# Altium PCB power_dist.PcbDoc
Units mm, origin at the board's own origin, x right, y up, seen from the top; angles counter-clockwise.
Board outline 72.45 x 72.45 mm, 2 copper layers (Top Layer, Bottom Layer); 66 components, 36 nets, 169 pads, 28 vias.
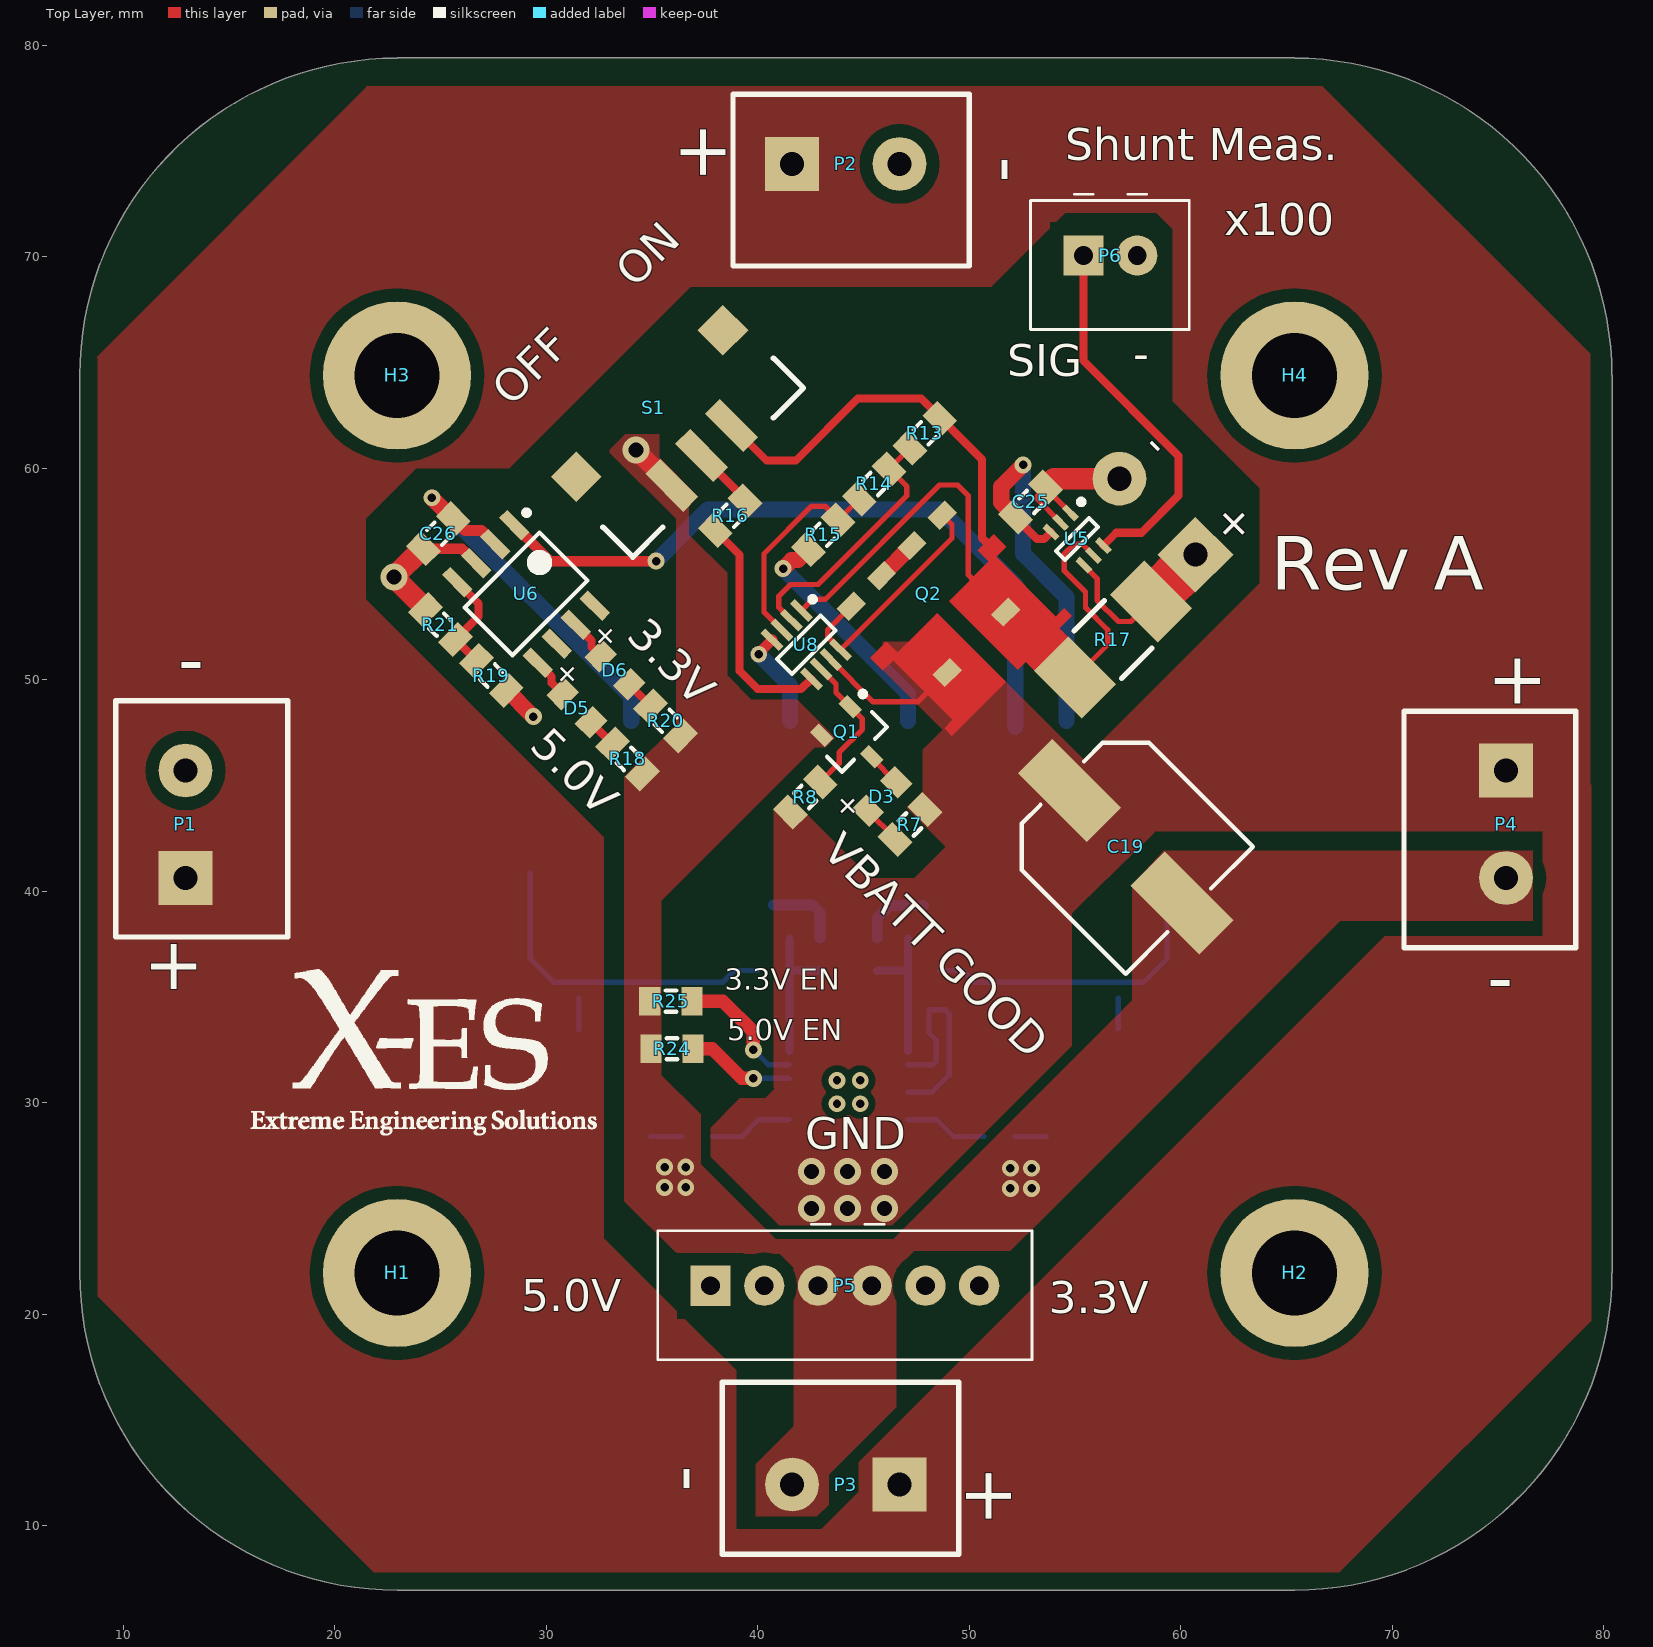
[diagram p0: Top Layer view]
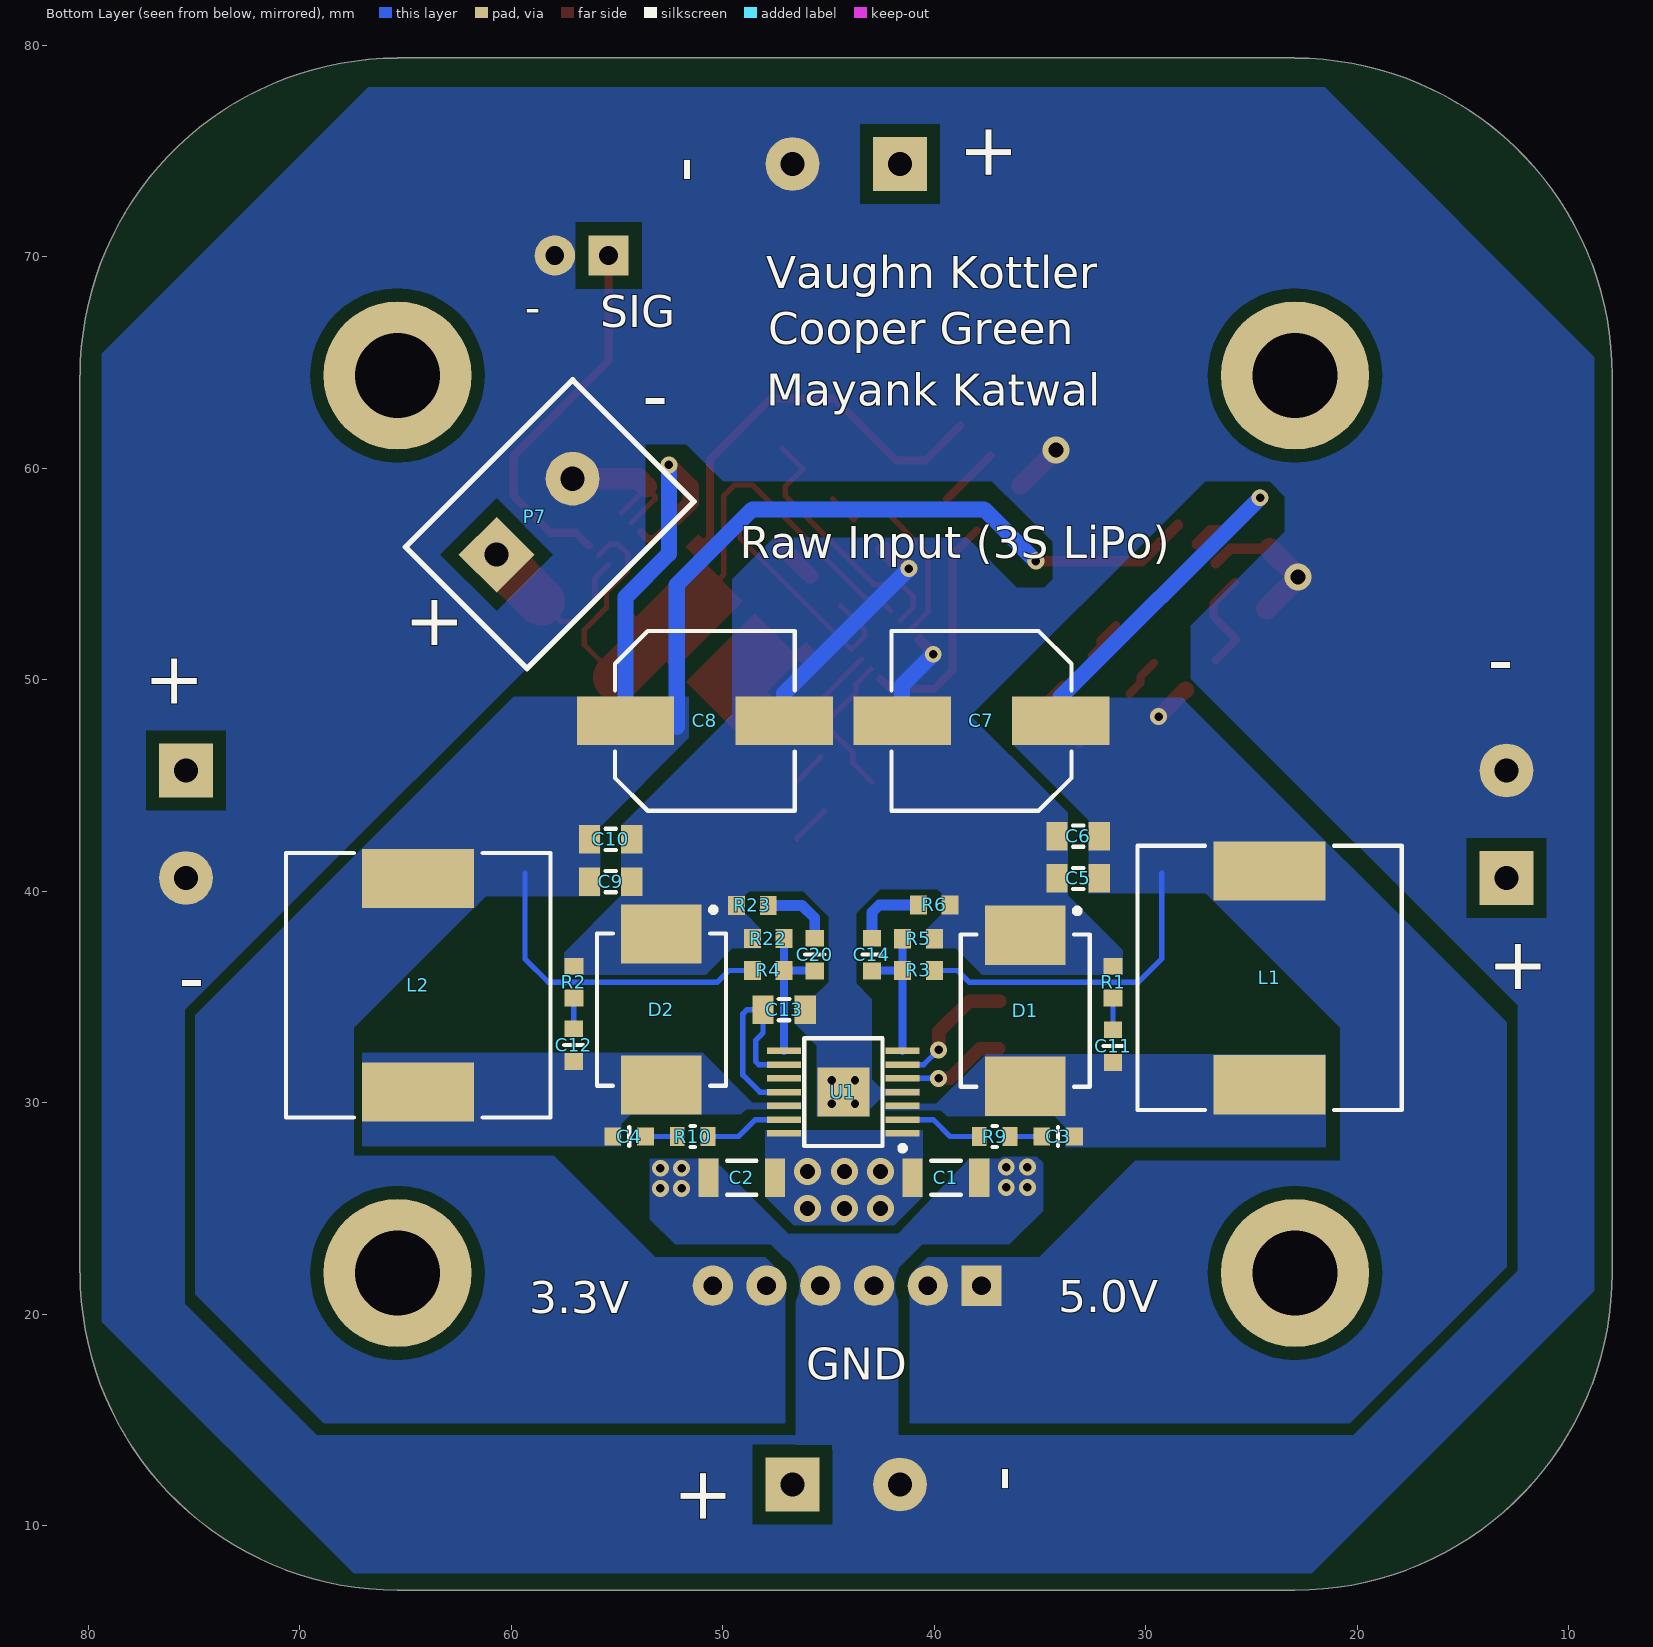
[diagram p1: Bottom Layer view, seen from below]
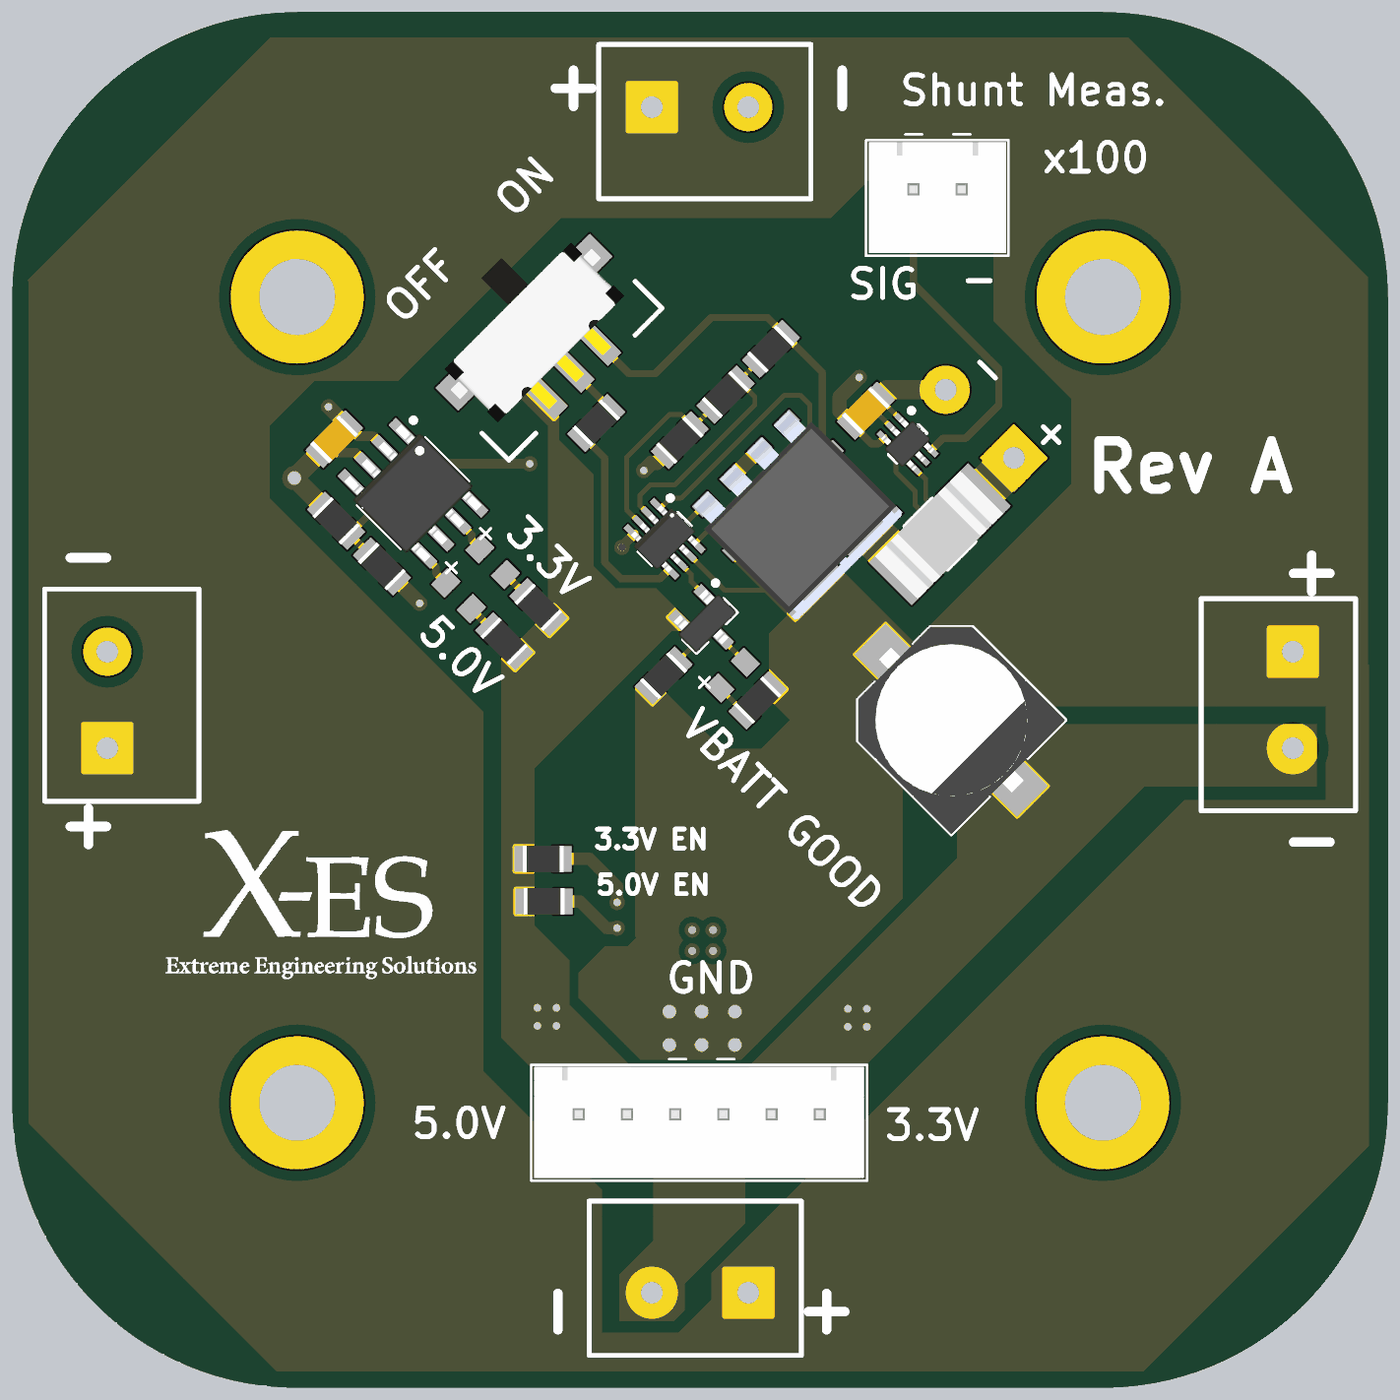
[diagram p2: 3D render of the assembled board from above, using the file's embedded part models]
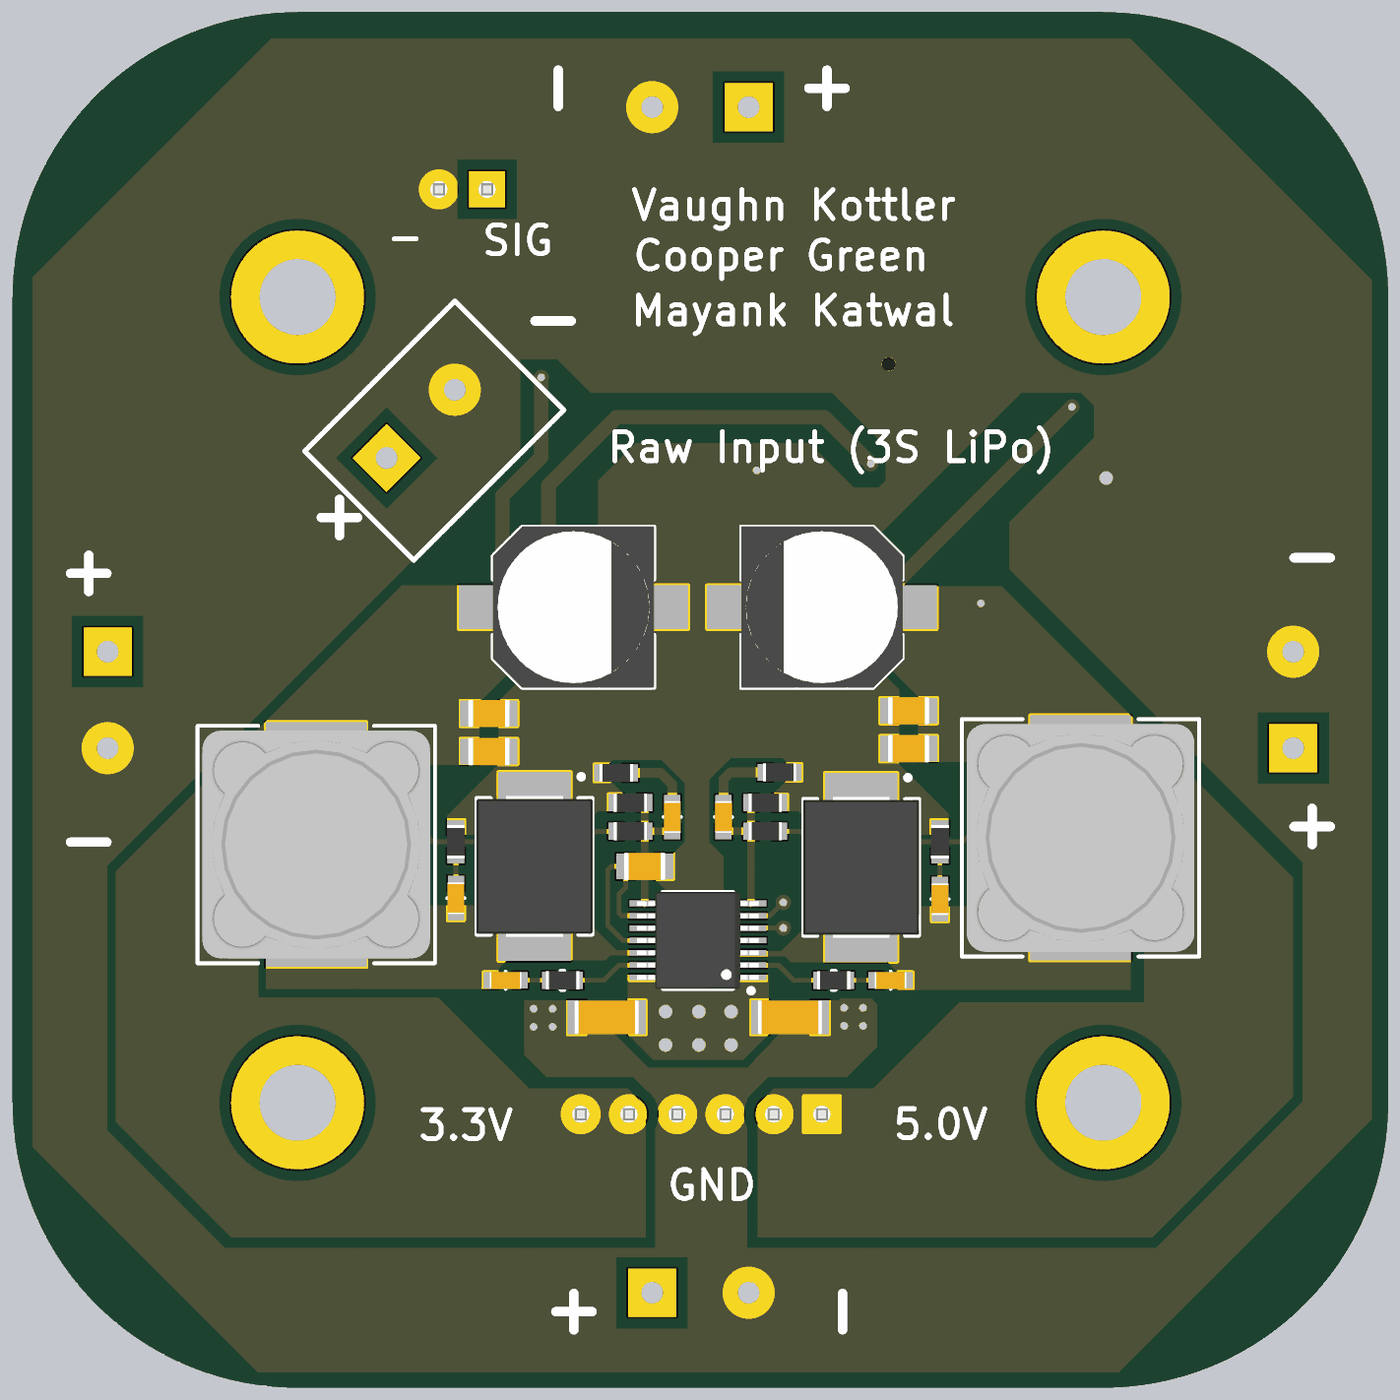
[diagram p3: 3D render of the assembled board from below, using the file's embedded part models]

## Layer stack, top to bottom
Top Solder: solder mask 0.0102, Solder Resist, Dk 3.5
Top Layer: signal copper 0.0356
Dielectric 1: dielectric 0.32, FR-4, Dk 4.8
Bottom Layer: signal copper 0.0356
Bottom Solder: solder mask 0.0102, Solder Resist, Dk 3.5

## Board outline
22.95,6.95 cw(c22.95,21.95) 7.95,21.95 7.95,64.38 cw(c22.95,64.38) 22.95,79.38 22.95,79.4 65.38,79.4 65.38,79.38 cw(c65.38,64.38) 80.38,64.38 80.4,64.38 80.4,21.95 80.38,21.95 cw(c65.38,21.95) 65.38,6.95

## Design rules (kind name [scope] priority, off if disabled: settings)
Clearance [All] p1: gap=0.152 ignorepadtopadclearanceinfootprint=FALSE except(0: Arc-Hole Track-Hole SMDPad-Hole THPad-Hole Via-Hole Text-Hole; 0.305: Via-Fill Via-Poly Via-Region Fill-Fill Fill-Poly Fill-Region Fill-Hole Poly-Poly Poly-Region Poly-Hole Region-Region Region-Hole; 0.61: THPad-Fill THPad-Poly THPad-Region)
HoleSize [All] p1: absolutevalues=TRUE maxlimit=6.3 minlimit=0.3 maxpercent=80.000 minpercent=20.000
MinimumSolderMaskSliver [All] p1: minsoldermaskwidth=0.102
PlaneClearance [All] p1: clearance=1
PolygonConnect PolygonConnect_3 [All vs (InNet('NetC3_1') OR InNet('NetC4_2'))] p1: connectstyle=Direct reliefconductorwidth=0.254 reliefentries=4 polygonreliefangle="90 Angle" airgapwidth=0.254
PolygonConnect PolygonConnect_2 [All vs (InNet('3V3') OR InNet('5V') OR InNet('GND'))] p2: connectstyle=Direct reliefconductorwidth=0.254 reliefentries=4 polygonreliefangle="90 Angle" airgapwidth=0.254
PolygonConnect PolygonConnect_1 [All vs InNet('VBATT+')] p3: connectstyle=Direct reliefconductorwidth=0.254 reliefentries=4 polygonreliefangle="90 Angle" airgapwidth=0.254
PolygonConnect [All] p4: connectstyle=Relief reliefconductorwidth=0.254 reliefentries=4 polygonreliefangle="90 Angle" airgapwidth=0.254
RoutingVias [All] p1: holewidth=0.711 width=1.27 viastyle="Through Hole" minholewidth=0.711 minwidth=1.27 maxholewidth=0.711 maxwidth=1.27
SilkToSolderMaskClearance [IsPad] p1 off: minsilkscreentomaskgap=0.254 clearancetoexposedcopper=TRUE
SolderMaskExpansion [All] p1: expansion=0.102
Width [All] p1: maxlimit=6.35 minlimit=0.152 preferedwidth=0.254
26 further rules are at their usual default settings.

## Classes and differential pairs
component class raw_input: C19 C25 H1 H2 H3 H4 P7 Q2 R13 R14 R15 R16 R17 S1 U5 U8
component class outputs: P1 P2 P3 P4 P5 P6
component class monitoring: C26 D3 D5 D6 Q1 R7 R8 R18 R19 R20 R21 U6
component class low_voltage_rails: C1 C2 C3 C4 C5 C6 C7 C8 C9 C10 C11 C12 C13 C14 C20 D1 D2 L1 L2 R1 R2 R3 R4 R5 R6 R9 R10 R22 R23 R24 R25 U1

## Components (designator, comment, footprint, x,y, rotation, side; value= is the part's Value field where it differs from the comment)
C1 "10 uF" CAP-CER-1206 39.45,26.45 r0 bottom
C2 "10 uF" CAP-CER-1206 49.1,26.45 r0 bottom
C3 "0.033 uF" CAP-CER-0603 34.15,28.4 r0 bottom
C4 "0.033 uF" CAP-CER-0603 54.425,28.4 r0 bottom
C5 "10 uF" CAP-CER-0805-TALL 33.2,40.6 r180 bottom
C6 "10 uF" CAP-CER-0805-TALL 33.2,42.6 r180 bottom
C7 "100 uF" CAP-CAN-8.3x8.3 37.77,48.05 r0 bottom
C8 "100 uF" CAP-CAN-8.3x8.3 50.85,48.05 r180 bottom
C9 "10 uF" CAP-CER-0805-TALL 55.3,40.45 r0 bottom
C10 "10 uF" CAP-CER-0805-TALL 55.3,42.45 r0 bottom
C11 "470 pF" CAP-CER-0603 31.55,32.675 r270 bottom
C12 "470 pF" CAP-CER-0603 57.043,32.725 r270 bottom
C13 "4.7 uF" CAP-CER-0805-TALL 47.1,34.4 r0 bottom
C14 "10 nF" CAP-CER-0603 42.95,37 r270 bottom
C19 "100 uF" CAP-CAN-8.3x8.3 57.4,42.1 r315 top
C20 "6.8 nF" CAP-CER-0603 45.65,37.002 r270 bottom
C25 "0.1 uF" CAP-CER-0805-SHORT 52.9,58.4 r225 top
C26 "0.1 uF" CAP-CER-0805-SHORT 24.9,56.9 r225 top
D1 "30V, 4A" DO-214AB-SMC 35.7,34.35 r270 bottom
D2 "30V, 4A" DO-214AB-SMC 52.9,34.4 r270 bottom
D3 "LED-WHT-20mA" LED-0805 45.872,44.472 r45 top
D5 "LED-WHT-20mA" LED-0805 31.45,48.65 r315 top
D6 "LED-WHT-20mA" LED-0805 33.25,50.45 r315 top
H1 "Mount Hole" "4MM MOUNT HOLE"#1 19.65,16.15 r0 top
H2 "Mount Hole" "4MM MOUNT HOLE"#2 65.45,21.6 r0 top
H3 "Mount Hole" "4MM MOUNT HOLE"#3 44.319,28.206 r0 top
H4 "Mount Hole" "4MM MOUNT HOLE"#4 65.38,64.38 r0 top
L1 "22 uH" IND-12mm 24.15,35.9 r270 bottom
L2 "22 uH" IND-12mm 64.4,35.55 r90 bottom
P1 "ESC Power" "2Pos Screw Terminal" 12.95,40.625 r180 top
P2 "ESC Power" "2Pos Screw Terminal" 41.625,74.38 r90 top
P3 "ESC Power" "2Pos Screw Terminal" 46.705,11.95 r270 top
P4 "ESC Power" "2Pos Screw Terminal" 75.38,45.705 r0 top
P5 "6Pos Pin Header" "6Pos Pin Header JST" 37.77,21.35 r90 top
P6 "2Pos Pin Header" "2Pos Pin Header JST" 55.4,70.05 r90 top
P7 "2Pos Screw Terminal" "2Pos Screw Terminal" 60.692,55.908 r45 bottom
Q1 "2N7002K" SOT-23-3 44.55,47.2 r315 top
Q2 "Dual N-Channel" "PowerPAK 8x8L" 49.15,53.05 r225 top
R1 "10" RES-0603#1 31.55,35.7 r90 bottom
R2 "10" RES-0603#1 57.043,35.7 r270 bottom
R3 "20K" RES-0603#1 40.75,36.25 r0 bottom
R4 "20K" RES-0603#1 47.85,36.25 r0 bottom
R5 "3.83K" RES-0603#1 40.75,37.75 r0 bottom
R6 "422" RES-0603#1 40,39.35 r0 bottom
R7 "680" RES-0805 47.2,43.15 r45 top
R8 "100K" RES-0805 42.25,44.45 r225 top
R9 "0" RES-0603#2 37.15,28.4 r0 bottom
R10 "0" RES-0603#2 51.425,28.4 r0 bottom
R13 "1.87M" RES-0805 47.9,61.65 r45 top
R14 "45.3K" RES-0805 45.508,59.25 r45 top
R15 "54.9K" RES-0805 43.1,56.85 r45 top
R16 "10K" RES-0805 38.7,57.75 r225 top
R17 "300u, 6W" RES-SHNT-2512 58.592,53.692 r225 top
R18 "330" RES-0805 33.85,46.25 r315 top
R19 "27K" RES-0805 27.407,50.193 r315 top
R20 "330" RES-0805 35.65,48.05 r315 top
R21 "10K" RES-0805 25,52.6 r315 top
R22 "6.34K" RES-0603#1 47.85,37.752 r180 bottom
R23 "698" RES-0603#1 48.6,39.327 r180 bottom
R24 "0" RES-0805 35.95,32.55 r0 top
R25 "0" RES-0805 35.9,34.8 r0 top
S1 "Slide Switch" "SMT Slide Switch RA" 37.35,60.6 r315 top
U1 "Dual 3A Converter, 300kHz" 14-HTSSOP 44.3,30.5 r0 bottom
U5 "INA199B2" SC70 55.1,56.65 r315 top
U6 "IC_TPS3705-33DGN.1" 8SOIC 29.05,54.05 r315 top
U8 "Over, Under, Reverse Protection" SOT-23-8 42.3,51.65 r315 top

## Footprints (in the part's own frame and the unit in brackets; to place one, negate y for a bottom-side part, rotate by r counter-clockwise, add the part's x,y. Pads: shape width x height; smd on the part's side, far side on the other; paste and mask are expansions set on the pad)
"2Pos Pin Header JST" [mil] "Female, 0.1\" Pitch"
  rect 75x75 hole 35: 1(0,0)
  round 75 hole 35: 2(0,-100)
  silkscreen extent -138,-197 114,98, body extent -132,-192 98,92, height 284
"2Pos Screw Terminal" [mil] "0.2\" Pitch"
  rect 100x100 hole 45: 1(0,0)
  round 100 hole 45: 2(0,-200)
  silkscreen extent -190,-330 130,110, body extent -179,-319 120,99, height 394
"4MM MOUNT HOLE"#1 [mm] "4mm"
  round 7 hole 4 unplated: H(3.3,5.8)
"4MM MOUNT HOLE"#2 [mm] "4mm"
  round 7 hole 4 unplated: H(-0.07,0.35)
"4MM MOUNT HOLE"#3 [mm] "4mm"
  round 7 hole 4 unplated: H(-21.369,36.174)
"4MM MOUNT HOLE"#4 [mm] "4mm"
  round 7 hole 4 unplated: H(0,0)
"6Pos Pin Header JST" [mil] "Male, 0.1\" Pitch"
  rect 75x75 hole 35: 1(0,0)
  round 75 hole 35: 2(0,-100) 3(0,-200) 4(0.01,-300) 5(0.01,-400) 6(0.02,-500)
  silkscreen extent -138,-598 114,98, body extent -132,-592 98,92, height 284
8SOIC [mm] "SOIC, 8-Leads, Body 4.90x3.90mm, Pitch 1.27mm, IPC Medium Density"
  rect 1.5x0.55 smd: 1(-2.7,1.905) 2(-2.7,0.635) 3(-2.7,-0.635) 4(-2.7,-1.905) 5(2.7,-1.905) 6(2.7,-0.635) 7(2.7,0.635) 8(2.7,1.905)
  silkscreen extent -2.82,-2.5 1.6,2.85, body extent -3,-2.5 3,2.5, height 1.75
14-HTSSOP [mm] "TSOP, 14-Leads, Body 5.00x4.40mm, Pitch 0.65mm, Thermal Pad 2.31x2.46mm, IPC Medium Density"
  rect 1.6x0.3 smd: 1(-2.8,1.95) 2(-2.8,1.3) 3(-2.8,0.65) 4(-2.8,0) 5(-2.8,-0.65) 6(-2.8,-1.3) 7(-2.8,-1.95) 8(2.8,-1.95) 9(2.8,-1.3) 10(2.8,-0.65) 11(2.8,0) 12(2.8,0.65) 13(2.8,1.3) 14(2.8,1.95)
  rect 2.46x2.31 smd: 15(0,0)
  silkscreen extent -2.92,-2.55 1.85,2.77, body extent -3.2,-2.55 3.2,2.55, height 1.2
CAP-CAN-8.3x8.3 [mm] "Aluminum Electrolytic Capacitor, Body 8.30x8.30x10.50mm, IPC Low Density"
  rect 4.6x2.3 smd: 1(-3.75,0) 2(3.75,0)
  silkscreen extent -4.25,-4.25 4.25,4.25, body extent -4.95,-4.25 4.95,4.25, height 10.5
CAP-CER-0603 [mm] "Chip Capacitor, 2-Leads, Body 1.60x0.80mm, IPC Medium Density"
  rect 0.79x0.86 smd: 1(-0.775,0) 2(0.775,0)
  silkscreen extent 0,-0.45 0,0.45, body extent -0.85,-0.45 0.85,0.45, height 0.9
CAP-CER-0805-SHORT [mm] "Chip Capacitor, 2-Leads, Body 2.00x1.25mm, IPC Medium Density"
  rect 1x1.35 smd: 1(-1,0) 2(1,0)
  silkscreen extent -0.25,-0.5 0.25,0.5, body extent -1.1,-0.72 1.1,0.72, height 0.9
CAP-CER-0805-TALL [mm] "Chip Capacitor, 2-Leads, Body 2.00x1.25mm, IPC Medium Density"
  rect 1x1.35 smd: 1(-1,0) 2(1,0)
  silkscreen extent -0.25,-0.5 0.25,0.5, body extent -1.1,-0.72 1.1,0.72, height 1.1
CAP-CER-1206 [mm] "Chip Capacitor, 2-Leads, Body 3.20x1.60mm, IPC Medium Density"
  rect 0.95x1.8 smd: 1(-1.575,0) 2(1.575,0)
  silkscreen extent -0.7,-0.8 0.7,0.8, body extent -1.7,-0.9 1.7,0.9, height 1.8
DO-214AB-SMC [mm] "Molded Diode, 2-Leads, Body 6.86x5.85mm, IPC Medium Density"
  rect 2.8x3.81 smd: 1(-3.57,0) 2(3.57,0)
  silkscreen extent -4.84,-3.05 3.6,3.05, body extent -3.78,-3.05 3.77,3.05, height 2.41
IND-12mm [mm] "Precision Wire Wound Inductor, 2-Leads, Body 12.00x12.00mm, IPC Medium Density"
  rect 2.8x5.3 smd: 1(-5.05,0) 2(5.05,0)
  silkscreen extent -6.25,-6.25 6.25,6.25, body extent -6,-6 6,6, height 10
LED-0805 [mm] "Chip Diode, 2-Leads, Body 2.00x1.25mm, IPC Medium Density"
  rect 1x1.2 smd: 1(-0.95,0) 2(0.95,0)
  body extent -0.9,-0.62 0.9,0.63, height 0.8
"PowerPAK 8x8L" [mm]
  rect 1.15x0.82 smd mask+0: D1(-1.925,1.72) D2(2.055,1.78)
  rect 1.15x0.82 smd: G1(-3.045,-3.64) G2(3.045,-3.64) S1(-1.015,-3.64) S2(1.015,-3.64)
  Top Layer region: -0.4,-0.54 -0.4,4.05 -4,4.05 -4,3.55 -3.45,3.55 -3.45,-0.44 -4.125,-0.44 -4.125,-1.29 -3.055,-1.29 -3.05,-0.54
  Top Layer region: 0.4,-0.54 0.4,4.05 4,4.05 4,3.55 3.45,3.55 3.45,-0.44 4.125,-0.44 4.125,-1.29 3.055,-1.29 3.05,-0.54
  body extent -4,-4.01 4,4.12, height 2
RES-0603#1 [mm] "Chip Resistor, 2-Leads, Body 1.60x0.85mm, IPC Medium Density"
  rect 0.8x0.9 smd: 1(-0.75,0) 2(0.75,0)
  body extent -0.87,-0.48 0.88,0.48, height 0.55
RES-0603#2 [mm] "Chip Resistor, 2-Leads, Body 1.60x0.85mm, IPC Medium Density"
  rect 0.7x0.9 smd: 1(-0.725,0) 2(0.725,0)
  silkscreen extent -0.1,-0.5 0.1,0.5, body extent -0.87,-0.48 0.88,0.48, height 0.55
RES-0805 [mm] "Chip Resistor, 2-Leads, Body 2.00x1.25mm, IPC Medium Density"
  rect 1x1.35 smd: 1(-1,0) 2(1,0)
  silkscreen extent -0.25,-0.5 0.25,0.5, body extent -1.07,-0.7 1.07,0.7, height 0.65
RES-SHNT-2512 [mil]
  rect 91x126 smd: 1(0,0) 2(200,0)
  silkscreen extent 60,-63 140,62, body extent -23,-63 227,62, height 52
SC70 [mm] "SOT23, 6-Leads, Body 2.00x2.10mm, Pitch 0.65mm, IPC Medium Density"
  rect 0.85x0.3 smd: 1(-1.1,0.65) 2(-1.1,0) 3(-1.1,-0.65) 4(1.1,-0.65) 5(1.1,0) 6(1.1,0.65)
  silkscreen extent -1.22,-1.1 0.3,1.5, body extent -1.2,-1.07 1.2,1.07, height 1.1
"SMT Slide Switch RA" [mm] "2mm Pitch"
  rect 2.55x1 smd: 1(0,-2) 2(0,0) 3(0,2)
  rect 1.7x1.7 smd: S(-3.475,4.9) S(-3.475,-4.9)
  silkscreen extent -0.9,-5.7 1.15,5.65, body extent -6.7,-5.24 0.69,5.25, height 3.05
SOT-23-3 [mm] "SOT23, 3-Leads, Body 2.92x2.37mm, Pitch 0.95mm, IPC Medium Density"
  rect 1x0.6 smd: 1(-1.2,0.95) 2(-1.2,-0.95) 3(1.2,0)
  silkscreen extent -1.32,-1.5 0.7,1.92, body extent -1.32,-1.52 1.32,1.52, height 1.12
SOT-23-8 [mm] "TSOP, 8-Leads, Body 2.90x1.63mm, Pitch 0.65mm, IPC Medium Density"
  rect 1.22x0.325 smd: 1(-1.31,0.975) 2(-1.31,0.325) 3(-1.31,-0.325) 4(-1.31,-0.975) 5(1.31,-0.975) 6(1.31,-0.325) 7(1.31,0.325) 8(1.31,0.975)
  silkscreen extent -1.43,-1.45 0.5,1.85, body extent -1.4,-1.45 1.4,1.45, height 1

## Part data
C1 C2: library part CAP-CER-10uF-25V-1206, "±20%, 1206", Supplier Part Number 1=445-14678-6-ND, ComponentLink1Description=Datasheet, ComponentLink1URL=https://search.murata.co.jp/Ceramy/image/img/A01X/G101/ENG/GRM21BR61E106KA73-01.pdf, Supplier 1=Digi-Key
C3 C4: library part CAP-CER-0.033uF-25V, "10%, 0603", Supplier Part Number 1=1276-6675-6-ND, Supplier 1=Digi-Key
C5 C6 C9 C10: library part CAP-CER-10uF-25V, "±10%, 0805", Supplier Part Number 1=490-5523-6-ND, ComponentLink1Description=Datasheet, ComponentLink1URL=https://search.murata.co.jp/Ceramy/image/img/A01X/G101/ENG/GRM21BR61E106KA73-01.pdf, Supplier 1=Digi-Key
C7 C8: library part CAP-CAN-100uF-10V, "±20%, 8.3mm x 8.3mm", Supplier Part Number 1=PCE3989DKR-ND, Supplier 1=Digi-Key
C11 C12: library part CAP-CER-470pF-50V, "20%, 0603", Supplier Part Number 1=311-3377-6-ND, Supplier 1=Digi-Key
C13: library part CAP-CER-4.7uF-10V, "±10%, 0805", ComponentLink1Description="Capacitor Book (Amazon)", ComponentLink1URL=https://www.amazon.com/gp/product/B0728HBDRW/
C14: library part CAP-CER-10nF-25V, "±20%, 0603", Supplier Part Number 1=399-8989-6-ND, Supplier 1=Digi-Key
C19: library part CAP-CAN-100uF-25V, "±20%, 8.3mm x 8.3mm", Supplier Part Number 1=PCE4003DKR-ND, Supplier 1=Digi-Key
C20: library part CAP-CER-6.8nF-25V, "±10%, 0603", Supplier Part Number 1=732-7982-6-ND, Supplier 1=Digi-Key
C25 C26: library part CAP-CER-0.1uF-25V, "10%, 0805", ComponentLink1Description="Capacitor Book (Amazon)", ComponentLink1URL=https://www.amazon.com/gp/product/B0728HBDRW/
D1 D2: library part DIO-500mV-30V-4A, "Schottky, SMC (DO-214AB)", Supplier Part Number 1=MBRS330T3GOSDKR-ND, ComponentLink1Description="Resistor Book (Amazon)", ComponentLink1URL=https://www.amazon.com/gp/product/B071J21FYF/, Supplier 1=Digi-Key
D3 D5 D6: "2.2V, 0805", Supplier Part Number 1=475-1410-1-ND, ComponentLink1Description="Resistor Book (Amazon)", ComponentLink1URL=https://www.amazon.com/gp/product/B071J21FYF/, Supplier 1=Digi-Key
L1 L2: library part IND-22uH-38m-5.2A, "±20%, 8 MHz res", Supplier Part Number 1=SRR1210-220MDKR-ND, ComponentLink1Description=Datasheet, ComponentLink1URL=https://www.bourns.com/docs/Product-Datasheets/SRR1210.pdf, Supplier 1=Digi-Key
P1 P2 P3 P4 P7: "0.2\" Pitch 1x2"
P5: "0.1\" Pitch 1x6"
P6: "0.1\" Pitch 1x2"
Q1: library part NMOS-2.0VT-60VDS-300mA, "N-Channel, SOT-23", Supplier Part Number 1=2N7002K-T1-E3DKR-ND, ComponentLink1Description=Datasheet, ComponentLink1URL=https://www.rohm.com/datasheet/RE1C002UN/re1c002untcl-e, Supplier 1=Digi-Key
Q2: library part SQJQ900E, "Dual N-Channel 40V 100A", Supplier Part Number 1=SQJQ900E-T1_GE3DKR-ND, ComponentLink1Description=Datasheet, ComponentLink1URL=http://www.vishay.com/docs/62796/sqjq900e.pdf, Supplier 1=Digi-Key
R1 R2: library part RES-10-1/4W, "5%, 0603", Supplier Part Number 1=RHM10DDKR-ND, Supplier 1=Digi-Key
R3 R4: library part RES-20K-1/10W, "1%, 0603", Supplier Part Number 1=P20.0KHDKR-ND, Supplier 1=Digi-Key
R5: library part RES-3.83K-1/10W, "1%, 0603", Supplier Part Number 1=P3.83KHDKR-ND, Supplier 1=Digi-Key
R6: library part RES-422-1/10W, "1%, 0603", Supplier Part Number 1=311-422HRCT-ND, Supplier 1=Digi-Key
R7: library part RES-680-1/8W, "0805", ComponentLink1Description="Resistor Book (Amazon)", ComponentLink1URL=https://www.amazon.com/gp/product/B071J21FYF/
R8: library part RES-100K-1/8W, "0805", ComponentLink1Description="Resistor Book (Amazon)", ComponentLink1URL=https://www.amazon.com/gp/product/B071J21FYF/
R9 R10: library part RES-0-1/10W, "0603", Supplier Part Number 1=P0.0GDKR-ND, Supplier 1=Digi-Key
R13: library part RES-1.87M-1/8W, "1%, 0805", Supplier Part Number 1=P1.87BTDKR-ND, Supplier 1=Digi-Key
R14: library part RES-45.3K-1/8W, "1%, 0805", Supplier Part Number 1=P45.3KCDKR-ND, Supplier 1=Digi-Key
R15: library part RES-54.9K-1/8W, "1%, 0805", Supplier Part Number 1=541-54.9KCDKR-ND, Supplier 1=Digi-Key
R16 R21: library part RES-10K-1/8W, "0805", ComponentLink1Description="Resistor Book (Amazon)", ComponentLink1URL=https://www.amazon.com/gp/product/B071J21FYF/
R17: library part RES-300u-6W, "2512, 1%", Supplier Part Number 1=541-3123-6-ND, ComponentLink1Description=Datasheet, ComponentLink1URL=http://www.vishay.com/docs/30193/wslf.pdf, Supplier 1=Digi-Key
R18 R20: library part RES-330-1/8W, "0805", ComponentLink1Description="Resistor Book (Amazon)", ComponentLink1URL=https://www.amazon.com/gp/product/B071J21FYF/
R19: library part RES-27K-1/8W, "0805", ComponentLink1Description="Resistor Book (Amazon)", ComponentLink1URL=https://www.amazon.com/gp/product/B071J21FYF/
R22: library part RES-6.34K-1/10W, "1%, 0603", Supplier Part Number 1=311-6.34KHRDKR-ND, Supplier 1=Digi-Key
R23: library part RES-698-1/10W, "1%, 0603", Supplier Part Number 1=RMCF0603FT698RDKR-ND, Supplier 1=Digi-Key
R24 R25: library part RES-0-1/8W, "0805", ComponentLink1Description="Resistor Book (Amazon)", ComponentLink1URL=https://www.amazon.com/gp/product/B071J21FYF/
S1: library part "SMT Slide Switch", "2mm Pitch", Supplier Part Number 1=360-2924-1-ND, Supplier 1=Digi-Key
U1: library part TPS54383, "Dual 3A Non-Synchronous Converters with Integrated High-Side MOSFET", Supplier Part Number 1=296-23087-6-ND, ComponentLink1Description=Datasheet, ComponentLink1URL=http://www.ti.com/lit/ds/symlink/tps54386.pdf, Supplier 1=Digi-Key
U5: "100 V/V, Current-Shunt Monitor", Supplier Part Number 1=INA199B2DCKR-ND, ComponentLink1Description=Datasheet, ComponentLink1URL=http://www.ti.com/lit/ds/symlink/ina199.pdf, Supplier 1=Digi-Key
U6: "IC 2.93V PROCESSOR MONITOR 8MSOP", Manufacturer="Texas Instruments", Manufacturer Part Number=TPS3705-33D, Number of Voltages Monitored=1, Operating Temperature="-40°C ~ 85°C (TA)", Package / Case="8-SOIC (0.154\", 3.90mm Width)", Supplier Device Package=8-SOIC, Supplier Part Number 1=296-2623-5-ND, Voltage - Threshold=2.93V, Category="Integrated Circuits (ICs)", ComponentLink1Description=Datasheet, ComponentLink1URL=http://www.ti.com/lit/ds/symlink/tps3705.pdf, Mounting Type="Surface Mount", Output="Push-Pull, Totem Pole", Packaging=Tube, Part Status=Active, Pricing 1="1=2.04, 10=1.831, 100=1.4718, 500=1.20926, 1000=1.00195, 2500=0.93285, 5000=0.8983, 10000=0.86375 (USD)", Reset="Active Low", Reset Timeout="140 ms Minimum", RoHS="RoHS Compliant", Stock 1=1844, Supplier 1=Digi-Key, Type="Simple Reset/Power-On Reset"
U8: library part LTC4365, "Overvoltage, Undervoltage and Reverse Supply Protection Controller", Supplier Part Number 1=LTC4365CTS8#TRMPBFDKR-ND, ComponentLink1Description=Datasheet, ComponentLink1URL=https://www.analog.com/media/en/technical-documentation/data-sheets/4365fa.pdf, Supplier 1=Digi-Key

## Via types
v1: diameter 0.8, hole 0.4, Top Layer to Bottom Layer, tented both sides, 16 vias
v2: diameter 1.27, hole 0.711, Top Layer to Bottom Layer, tented both sides, 8 vias
v3: diameter 0.8, hole 0.4, Top Layer to Bottom Layer, tented top, 4 vias

## Nets (pads, with @x,y where several pads share a name; then routed paths per layer and width w, separated by ;. In a path a pad name is that pad's centre, name@x,y a point inside that pad or via, vN(x,y) a via of type N, cw(c..) or ccw(c..) an arc to the next point about the centre after c; other vN are vias at no path point)
3V3: C8.1 C9.2 C10.2 C25.2 L2.2 P5.5 P5.6 R4.2 U5.3 U6.1 | length 67.5
  Top Layer w0.381: C25.2@52.157,57.693 53.2,56.65 53.544,56.65 U5.3
  Top Layer w0.508: U6.1 30.194,55.6 v1(35.2,55.6)
  Top Layer w0.762: C25.2 51.517,58.369 51.517,59.117 v1(52.55,60.15)
  Bottom Layer w0.254: R4.2 49.7,36.25 50.25,35.7 58.25,35.7 59.35,36.8 59.35,40.85
  Bottom Layer w0.762: v1(35.2,55.6) 37.65,58.05 48.6,58.05 52.175,54.475 52.175,47.775 ; v1(52.55,60.15) 52.55,55.95 54.6,53.9 C8.1
3V3_EN: R25.2 U1.6 | length 6.3
  Top Layer w0.635: R25.2 38.35,34.8 39.8,33.35 v1(39.8,32.5)
  Bottom Layer w0.254: v1(39.8,32.5) 40.5,31.8 U1.6
5V: C5.2 C6.2 C7.1 C26.1 L1.1 P5.1 P5.2 R3.1 R19.2 U6.2 | length 35.7
  Top Layer w0.254: C26.1@25.593,57.607 C26.1
  Top Layer w0.508: C26.1 26.164,57.05 26.948,57.05 U6.2
  Top Layer w0.762: v1(24.6,58.6) C26.1@25.593,57.607 ; R19.2 28.114,49.536 v1(29.4,48.25)
  Bottom Layer w0.254: 29.25,40.85 29.25,36.8 30.35,35.7 38.35,35.7 38.9,36.25 R3.1
  Bottom Layer w0.762: v1(24.6,58.6) 34.02,49.18 C7.1
5V_EN: R24.2 U1.5 | length 5.1
  Top Layer w0.635: R24.2 37.85,32.55 39.25,31.15 v1(39.8,31.15)
  Bottom Layer w0.254: v1(39.8,31.15) U1.5
CURR_MEAS: P6.1 U5.6 | length 17.8
  Top Layer w0.381: P6.1 55.4,65.078 59.9,60.578 59.9,58.7 58.144,56.944 56.95,56.944 U5.6
GND: C1.1 C2.2 C5.1 C6.1 C7.2 C8.2 C9.1 C10.1 C13.1 C19.2 C25.1 C26.2 D1.1 D2.1 P1.2 P2.2 P3.2 P4.2 P5.3 P5.4 P6.2 P7.2 Q1.2 R1.2 R2.1 R5.1 R6.1 R15.1 R18.2 R20.2 R21.1 R22.1 R23.1 R24.1 R25.1 S1.1 U1.4 U1.15 U5.1 U5.2 U6.3 U8.4 | length 32.8
  Top Layer w0.254: C26.2@24.143,56.193 C26.2 ; R21.1 R21.1@24.293,53.357 ; v1(40.05,51.2) v1@40.05,51.253 ; U5.2 53.2,58.55 53.2,58.655 53.607,59.062 U5.1
  Top Layer w0.508: C26.2 26.009,56.193 U6.3 ; v1@40.05,51.253 U8.4
  Top Layer w0.762: v1(41.2,55.25) 41.6,55.65 41.9,55.65 R15.1
  Top Layer w0.889: v2(34.25,60.85) 35.914,59.186 S1.1
  Top Layer w1.016: C26.2@24.143,56.193 v2(22.8,54.85) R21.1@24.293,53.357 ; C25.1 54,59.5 P7.2
  Bottom Layer w0.762: v1(40.05,51.2) 41.52,49.73 C7.2 ; v1(41.2,55.25) 47.1,49.35 C8.2
  other v1: 51.95,25.95 52.95,25.95 35.6,26 36.6,26 51.95,26.9 52.95,26.9 35.6,26.95 36.6,26.95
  other v3: 43.75,29.95 44.85,29.95 43.75,31.05 44.85,31.05
NetC3_1: C3.1 C11.2 D1.2 L1.2 U1.3
NetC3_2: C3.2 R9.1 | length 1.5
  Bottom Layer w0.254: C3.2 R9.1
NetC4_1: C4.1 R10.2 | length 1.5
  Bottom Layer w0.254: R10.2 C4.1
NetC4_2: C4.2 C12.2 D2.2 L2.1 U1.12
NetC11_1: C11.1 R1.1 | length 1.5
  Bottom Layer w0.254: C11.1 R1.1
NetC12_1: C12.1 R2.2 | length 1.5
  Bottom Layer w0.254: C12.1 R2.2
NetC13_2: C13.2 U1.9 U1.11 | length 10.2
  Bottom Layer w0.254: U1.11 48.25,30.5 49.05,31.3 49.05,34.2 48.85,34.4 C13.2 48.1,33.3 48.45,32.95 48.45,31.95 48.3,31.8 U1.9
NetC14_1: C14.1 R6.2 | length 3.6
  Bottom Layer w0.508: R6.2 42.6,39.35 42.95,39 C14.1
NetC14_2: C14.2 R3.2 R5.2 U1.7 | length 6.8
  Bottom Layer w0.381: U1.7 R3.2 ; R5.2 R3.2 ; C14.2 42.925,36.25 R3.2
NetC20_1: C20.1 R23.2 | length 3.4
  Bottom Layer w0.508: C20.1 45.65,38.727 46.25,39.327 R23.2
NetC20_2: C20.2 R4.1 R22.2 U1.8 | length 6.8
  Bottom Layer w0.381: C20.2 45.673,36.25 R4.1 ; U1.8 R4.1 ; R22.2 R4.1
NetD3_1: D3.1 R7.1 | length 1.9
  Top Layer w0.254: D3.1 46.493,42.507 R7.1
NetD3_2: D3.2 Q1.3 | length 1.7
  Top Layer w0.254: Q1.3 45.399,46.288 D3.2
NetD5_1: D5.1 U6.5 | length 2
  Top Layer w0.381: U6.5 30.25,50.156 30.25,49.85 D5.1
NetD5_2: D5.2 R18.1 | length 1.4
  Top Layer w0.381: D5.2 R18.1
NetD6_1: D6.1 U6.7 | length 2
  Top Layer w0.381: U6.7 32.15,51.848 32.15,51.55 D6.1
NetD6_2: D6.2 R20.1 | length 1.4
  Top Layer w0.381: D6.2 R20.1
NetQ2_G1: Q2.G1 Q2.G2 U8.8 | length 11.5
  Top Layer w0.254: Q2.G2 43.3,52.348 43.3,52.029 U8.8 49.185,56.683 49.185,57.321 Q2.G1
NetQ2_S1: Q2.S1 Q2.S2 | length 2
  Top Layer w0.762: Q2.S2 Q2.S1
NetR9_2: R9.2 U1.2 | length 4
  Bottom Layer w0.254: R9.2 39.25,28.4 40.05,29.2 U1.2
NetR10_1: R10.1 U1.13 | length 3.9
  Bottom Layer w0.254: U1.13 48.45,29.2 49.25,28.4 R10.1
NetR13_1: R13.1 R14.2 U8.2 | length 12.4
  Top Layer w0.254: U8.2 41,53.41 41,53.95 41.55,54.5 42.85,54.5 47.05,58.7 47.05,59.131 46.216,59.966 R13.1
NetR14_1: R14.1 R15.2 U8.3 | length 10.1
  Top Layer w0.254: U8.3 40.3,53.19 40.3,55.95 42.55,58.2 43.173,58.2 43.816,57.557 R14.1
NetR16_1: R16.1 S1.2 | length 3
  Top Layer w0.254: R16.1 R16.1@39.407,58.543
  Top Layer w0.381: S1.2 R16.1@39.407,58.543
NetR16_2: R16.2 U8.5 | length 11.1
  Top Layer w0.381: R16.2 39.15,55.886 39.15,50.4 40,49.55 42.053,49.55 U8.5
NetR19_1: R19.1 R21.2 U6.4 | length 5
  Top Layer w0.381: U6.4 26.8,53.606 26.8,52.986 R21.2 R19.1
VBATT+: C1.2 C2.1 C19.1 P1.1 P2.1 P3.1 P4.1 Q2.D2 R7.2 R8.2 U1.1 U1.14 U8.7 | length 6.9
  Top Layer w0.254: U8.7 45.46,48.95 47.567,48.95 Q2.D2
  other v2: 42.55,25 44.25,25 46,25 42.55,26.75 44.25,26.75 46,26.75
VBATT_FAULT_N: Q1.1 R8.1 U8.6 | length 7
  Top Layer w0.254: R8.1 43.85,46.05 43.85,46.55 44.95,47.65 44.95,48.144 Q1.1 43.7,49.394 43.7,49.79 U8.6
VBATT_MEAS+: P7.1 R17.1 U5.4 | length 8.4
  Top Layer w0.254: U5.4 56.05,54.781 56.05,53.75 57.05,52.75 57.65,52.75 R17.1 ; P7.1@60.692,55.792 P7.1
  Top Layer w2.286: R17.1 P7.1@60.692,55.792
VBATT_MEAS-: Q2.D1 R13.2 R17.2 S1.3 U5.5 U8.1 | length 49.9
  Top Layer w0.254: U8.1 42.597,53.8 43.2,53.8 48.6,59.2 49.45,59.2 49.95,58.7 49.95,54.972 Q2.D1 Q2.D1@51.905,53.195 ; R17.2 56.55,51.65 56.55,52.35 55.5,53.4 55.5,54.139 54.489,55.15 54.489,55.939 54.95,56.4 55.35,56.4 U5.5
  Top Layer w0.381: S1.3 40.428,60.35 41.8,60.35 44.75,63.3 47.714,63.3 50.6,60.414 50.6,56.693 51.1,56.193
  Top Layer w2.286: Q2.D1@51.905,53.195 R17.2
pads on no net: H1.H H2.H H3.H H4.H S1.S U1.10 U6.6 U6.8

## Polygon pours and split planes (outlines as drawn)
VBATT+ on Top Layer "Top Layer-VBATT+ 1" (solid, pour order 40): 57.925,42.816 77.116,42.816 79.35,45.05 79.35,65.4 66.7,78.05 21.5,78.05 21.5,78 8.75,65.25 8.8,65.2 8.8,20.85 21.85,7.8 67.5,7.8 79.4,19.7 79.4,45.1 77.1,42.8 77.1,37.9 69.65,37.9 44.75,13 44.75,11.6 43,9.85 39,9.85 39,17.35 32.75,23.6 32.75,42.55 21.5,53.8 21.5,57.6 23.866,59.966 28.258,59.966 36.843,68.55 51.05,68.55 54.55,72.05 58.85,72.05 59.6,71.3 59.6,63.15 63.7,59.05 63.7,54.55 54.961,45.811
VBATT+ on Top Layer "Top Layer-VBATT+ 2" (solid, pour order 38): 46.35,24.2 41.02,24.2 37.77,27.45 37.77,28.82 39.15,30.2 40.35,30.2 40.8,30.65 40.75,30.7 40.75,43.9 41.4,44.55 42.3,43.65 45.35,40.6 47.4,40.6 51.975,45.175 54.842,42.308 54.842,32.692
GND on Top Layer "Top Layer-GND" (solid, pour order 42): 32.95,60.8 36.15,57.6 36.15,47.136 43.427,47.136 43.427,47.498 41.875,49.05 39.7,49.05 38.55,50.2 38.55,55.05 36.75,56.85 36.75,58.205 37.2,58.655 35.35,60.505 35.35,61.6 33.75,61.6
GND on Top Layer "Top Layer-GND 1" (solid, pour order 28): 59.2,41.9 76.65,41.9 76.65,38.6 67.55,38.6 53.45,24.5 51.95,23 47.4,23 46.55,22.15 46.55,15.6 43.35,12.4 43.35,11 42.8,10.45 39.9,10.45 39.9,12.9 41.7,14.7 41.7,22.2 41.05,22.85 36.2,22.85 33.7,25.35 33.7,28.05 36.35,28.05 40.85,23.55 46.4,23.55 57.7,34.85 57.7,40.3
GND on Top Layer "Top Layer-GND 2" (solid, pour order 26): 43.643,47.257 43,47.9 36.744,47.906 36.475,48.175 33.7,45.4 33.7,36.15 33.7,25.35 37.3,25.35 37.3,29.45 35.45,31.3 35.45,39.55 42.7,46.8 43.211,46.8
VBATT+ on Top Layer "Top Layer-VBATT+" (solid, pour order 2): 53.423,37.577 47.05,43.95 47.75,44.65 47.8,44.65 47.8,46.68 48.76,47.64 45.922,50.478 45.922,51.802 47.138,51.802 48.478,53.142 58.804,42.816
GND on Bottom Layer "Bottom Layer-GND 2" (solid, pour order 36): 12.4,34.55 27.9,50.05 27.9,52.55 23.45,57 23.45,58.65 24.15,59.35 49.975,59.35 51.725,61.1 53.65,61.1 53.65,56.15 75.4,34.4 75.4,20.5 69.2,14.3 20.2,14.3 12.45,22.05 12.45,34.55 8.8,34.55 8.8,21.1 22.15,7.75 67.45,7.75 79.35,19.65 79.35,65.41 66.76,78 21.55,78 8.8,65.25 8.8,34.55
3V3 on Bottom Layer "Bottom Layer-3V3" (solid, pour order 20): 47.05,21.75 48,22.7 53.19,22.7 57.99,27.5 67.45,27.5 67.45,33.54 51.79,49.2 59.89,49.2 74.95,34.14 74.95,20.954 68.859,14.85 47.05,14.85
5V on Bottom Layer "Bottom Layer-5V" (solid, pour order 18): 40.3,22.7 41.15,21.85 41.15,14.85 20.35,14.85 12.95,22.25 12.95,33.8 28.3,49.15 36.4,49.15 20.8,33.55 20.8,27.25 30.5,27.25 35.05,22.7
GND on Bottom Layer "Bottom Layer-GND 3" (solid, pour order 44): 38.775,60.875 34.412,56.512 34.412,54.738 34.8,54.35 36.1,54.35 38.45,56.7 47.6,56.7 49.55,54.75 49.55,46.3 40.275,46.3 25.937,60.637 32.475,67.175
GND on Bottom Layer "Bottom Layer-GND 1" (solid, pour order 22): 38.35,27.35 36.9,27.35 36.8,27.45 35.15,27.45 34.85,27.15 34.85,24.9 36.45,23.3 40.575,23.3 41.7,22.175 41.7,13.6 46.55,13.6 46.55,22.123 47.727,23.3 52.25,23.3 53.45,24.5 53.45,27.35 50.2,27.35 50.2,27.1 46.9,23.8 41.7,23.8
GND on Bottom Layer "Bottom Layer-GND" (solid, pour order 16): 38.175,36.5 37.725,36.05 31.1,36.05 31.1,37.2 33.7,39.8 33.7,43.7 39.2,49.2 49.55,49.2 49.55,48.35 54.8,43.1 54.8,39.8 57.5,37.1 57.5,36.05 50.8,36.05 50.3,36.55 49.55,37.3 48.2,37.3 48.2,38.2 48.9,38.9 48.95,38.9 48.95,39.8 48.75,40 46.2,40 45,38.8 45,35.7 45.65,35.05 46.6,35.05 46.6,33.75 45.55,32.7 45.55,29.35 43.05,29.35 43.05,29.7 42.4,30.35 40.7,30.35 40.7,30.65 42.5,30.65 42.95,31.1 42.95,34.9 43.7,35.65 43.7,38.95 42.55,40.1 39.85,40.1 39.65,39.9 39.65,38.9 40.4,38.15 40.4,37.3 38.975,37.3
3V3 on Bottom Layer "Bottom Layer-3V3 1" (solid, pour order 14): 55.8,39.75 55.8,43.05 51.6,47.25 51.6,49.2 56.85,49.2 64.05,42 67.05,42 67.05,39.2 61.75,39.2 61.2,39.75
5V on Bottom Layer "Bottom Layer-5V 1" (solid, pour order 12): 32.7,39.9 32.7,43.35 36.3,46.95 36.3,49.15 31.75,49.15 24.95,42.35 21.5,42.35 21.5,39.55 26.8,39.55 27.15,39.9
NetC3_1 on Bottom Layer "Bottom Layer-NetC3_1" (solid, pour order 10): 42.3,29.95 42.3,29.65 39.7,29.65 39.4,29.35 34.3,29.35 33.8,28.85 33.8,27.9 33,27.9 21.5,27.9 21.5,32.3 31.15,32.3 33.7,32.3 37.55,32.3 39.9,29.95
NetC4_2 on Bottom Layer "Bottom Layer-NetC4_2" (solid, pour order 8): 46.3,30 46.3,29.7 48.9,29.7 49.15,29.45 54.35,29.45 54.8,29 54.8,27.95 55.6,27.95 67.05,27.95 67.05,32.35 57.45,32.35 54.9,32.35 50.95,32.35 48.6,30
VBATT+ on Bottom Layer "Bottom Layer-VBATT+" (solid, pour order 4): 48,25.55 46.65,24.2 41.9,24.2 40.55,25.55 40.55,28.7 48,28.7

## Silkscreen, mask and mechanical layers (free items; w line width, h text height)
Top Overlay:
  drawing of 2014 lines, arcs and shapes, not listed
  text "Shunt Meas." at 54.55,74.55 h1.52
  text "+" at 38.48,73.5 h2.5 r90
  text "-" at 52.63,73.5 h2.5 r90
  text "x100" at 62.05,71 h1.52
  text "ON" at 34.2,68.45 h1.52 r45
  text "-" at 57.75,64.65 h1.52
  text "SIG" at 51.8,64.35 h1.52
  text "OFF" at 28.35,62.85 h1.52 r45
  text "-" at 58.1,60.9 h1.52 r315
  text "+" at 61.45,57.5 h1.52 r315
  text "Rev A" at 64.25,54.25 h2.54
  text "3.3V" at 33.75,52 h1.52 r315
  text "-" at 13.83,51.63 h2.5 r180
  text "+" at 74.5,48.85 h2.5
  text "5.0V" at 29.15,46.8 h1.52 r315
  text "VBATT GOOD" at 42.983,41.85 h1.52 r315
  text "+" at 13.83,37.48 h2.5 r180
  text "3.3V EN" at 38.45,35.35 h1
  text "-" at 74.5,34.7 h2.5
  text "5.0V EN" at 38.55,32.95 h1
  text "GND" at 42.25,27.8 h1.52
  text "5.0V" at 28.831,20.15 h1.52
  text "3.3V" at 53.75,20.05 h1.52
  text "-" at 35.7,12.83 h2.5 r270
  text "+" at 49.85,12.83 h2.5 r270
Bottom Overlay:
  text "+" at 38.48,73.5 h2.5 r90
  text "-" at 52.63,73.5 h2.5 r90
  text "Vaughn Kottler" at 47.95,68.5 h1.52
  text "-" at 58.6,66.85 h1.52
  text "SIG" at 55.8,66.65 h1.52
  text "Cooper Green" at 47.85,65.85 h1.52
  text "-" at 53.8,64.1 h2.5 r180
  text "Mayank Katwal" at 47.95,62.95 h1.52
  text "Raw Input (3S LiPo)" at 49.2,55.75 h1.52
  text "+" at 65.05,53.75 h2.5 r180
  text "-" at 13.83,51.63 h2.5 r180
  text "+" at 74.5,48.85 h2.5
  text "+" at 13.83,37.48 h2.5 r180
  text "-" at 74.5,34.7 h2.5
  text "5.0V" at 34.15,20.1 h1.52
  text "3.3V" at 59.15,20.05 h1.52
  text "GND" at 46.05,16.9 h1.52
  text "-" at 35.7,12.83 h2.5 r270
  text "+" at 49.85,12.83 h2.5 r270
Mechanical 1:
  lines w0.5: 2.85,6.95 7.85,6.95 7.95,6.85 7.95,2.15 ; 2.85,79.4 7.85,79.4 ; 5.4,6.95 5.4,79.4 ; 7.95,4.6 80.4,4.6 ; 80.4,2.15 80.4,7.15
  text "71.95mm (2832.68mil)" at 2.254,76.9 h1.52 r270
  text "71.95mm (2832.68mil)" at 10.4,1.4 h1.52
Board Outline:
  lines w0.5: 22.95,79.38 ccw(c22.95,64.38) 7.95,64.38 7.95,21.95 ccw(c22.95,21.95) 22.95,6.95 65.38,6.95 ccw(c65.38,21.95) 80.38,21.95 ; 22.95,79.4 65.38,79.4 ; 65.38,79.38 cw(c65.38,64.38) 80.38,64.38 ; 80.4,21.95 80.4,64.38
Mechanical 15:
  circle w0.254: c65.38,64.38 r4
  circle w0.254: c22.95,64.38 r4
  circle w0.254: c22.95,21.95 r4
  circle w0.254: c65.38,21.95 r4

## Text inside footprints (layer, text, board x,y; h text height)
D3: Top Overlay "+" at 44.166,43.304 h1 r45
D5: Top Overlay "+" at 30.283,50.356 h1 r315
D6: Top Overlay "+" at 32.083,52.156 h1 r315